# Altium PCB OBDIIBoard_MCP2551.PcbDoc
Units mm, origin at the board's own origin, x right, y up, seen from the top; angles counter-clockwise.
Board outline 44 x 44 mm, 2 copper layers (Top Layer, Bottom Layer), stack 1.571 mm thick; 38 components, 27 nets, 147 pads, 28 vias.
Unrouted connection lines stored in the file: 12.
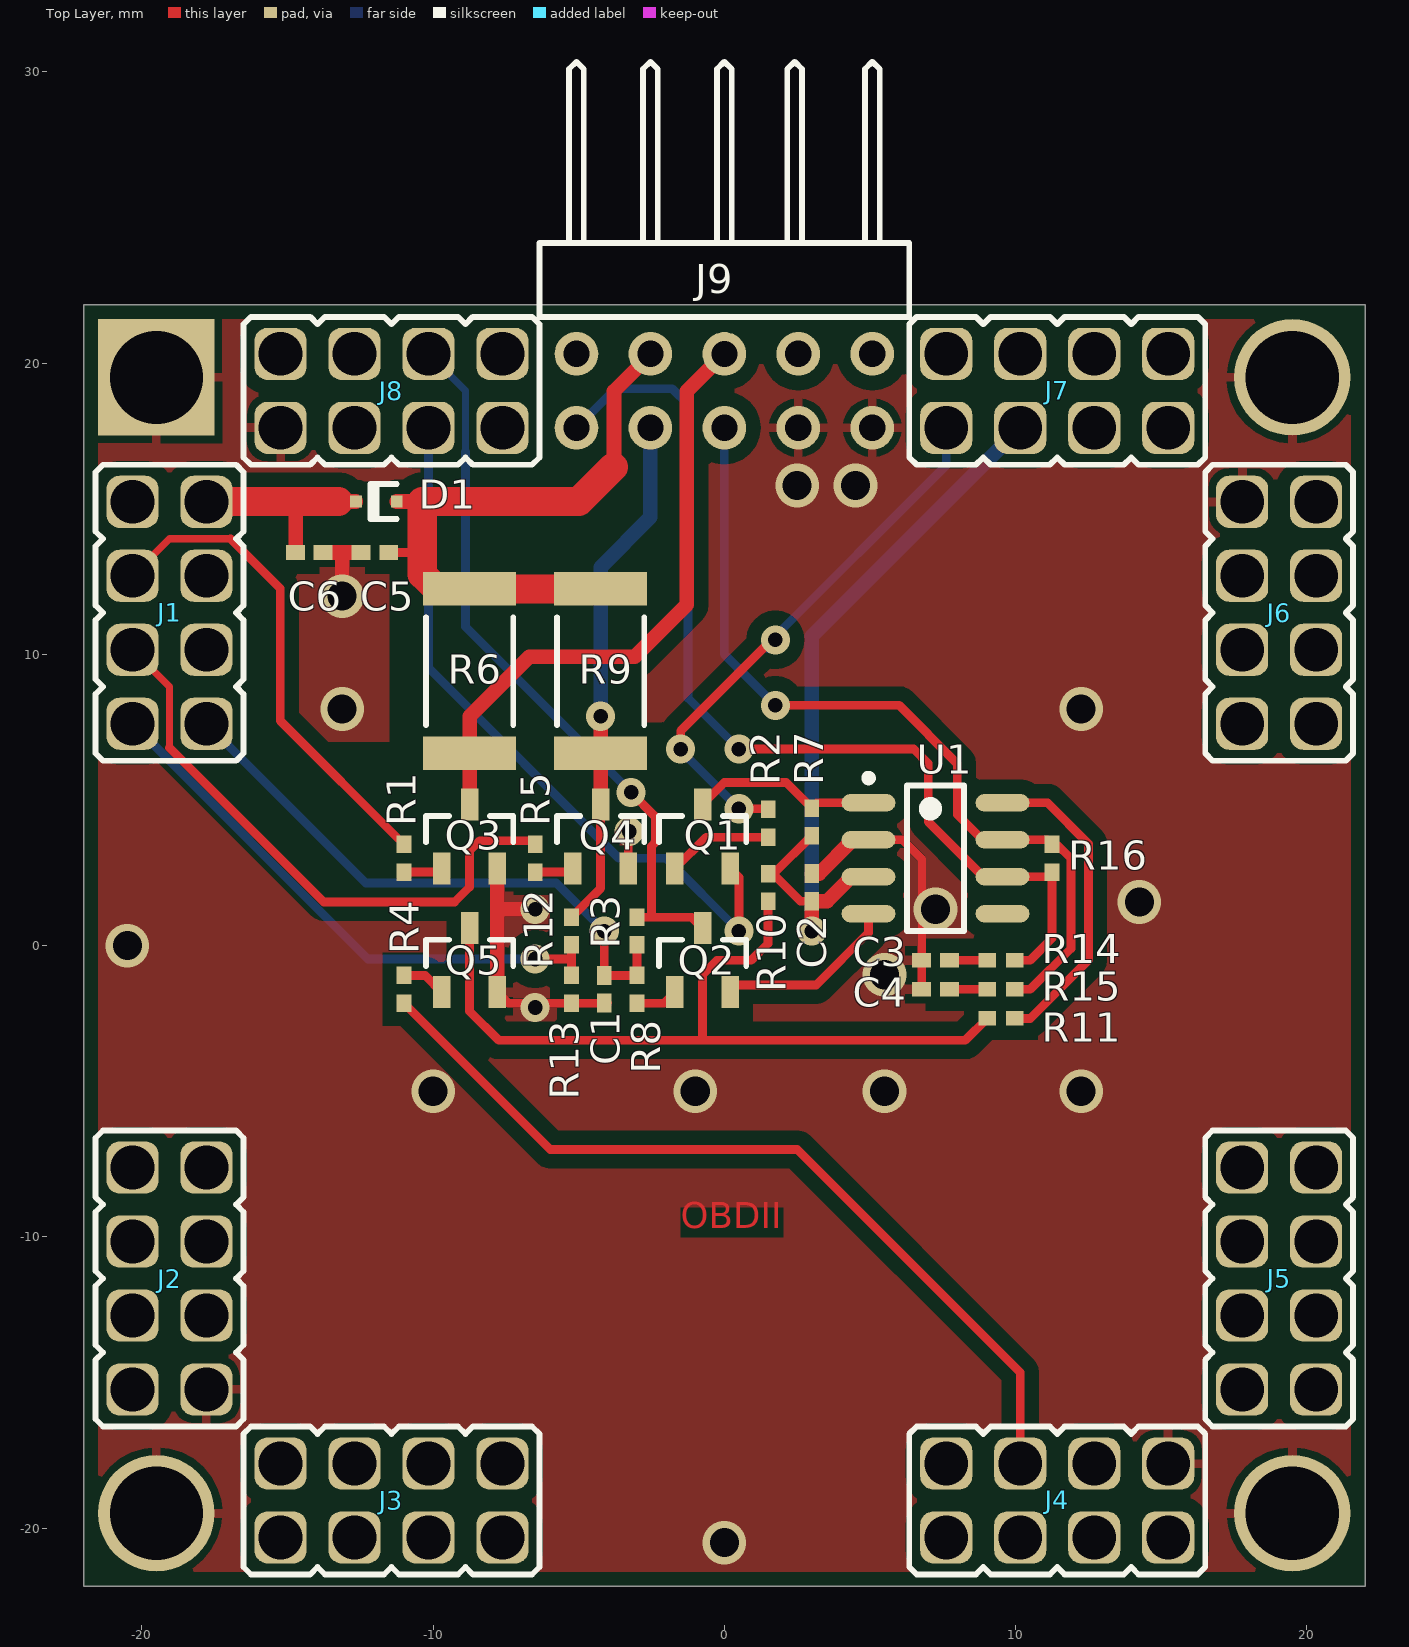
[diagram p0: Top Layer view]
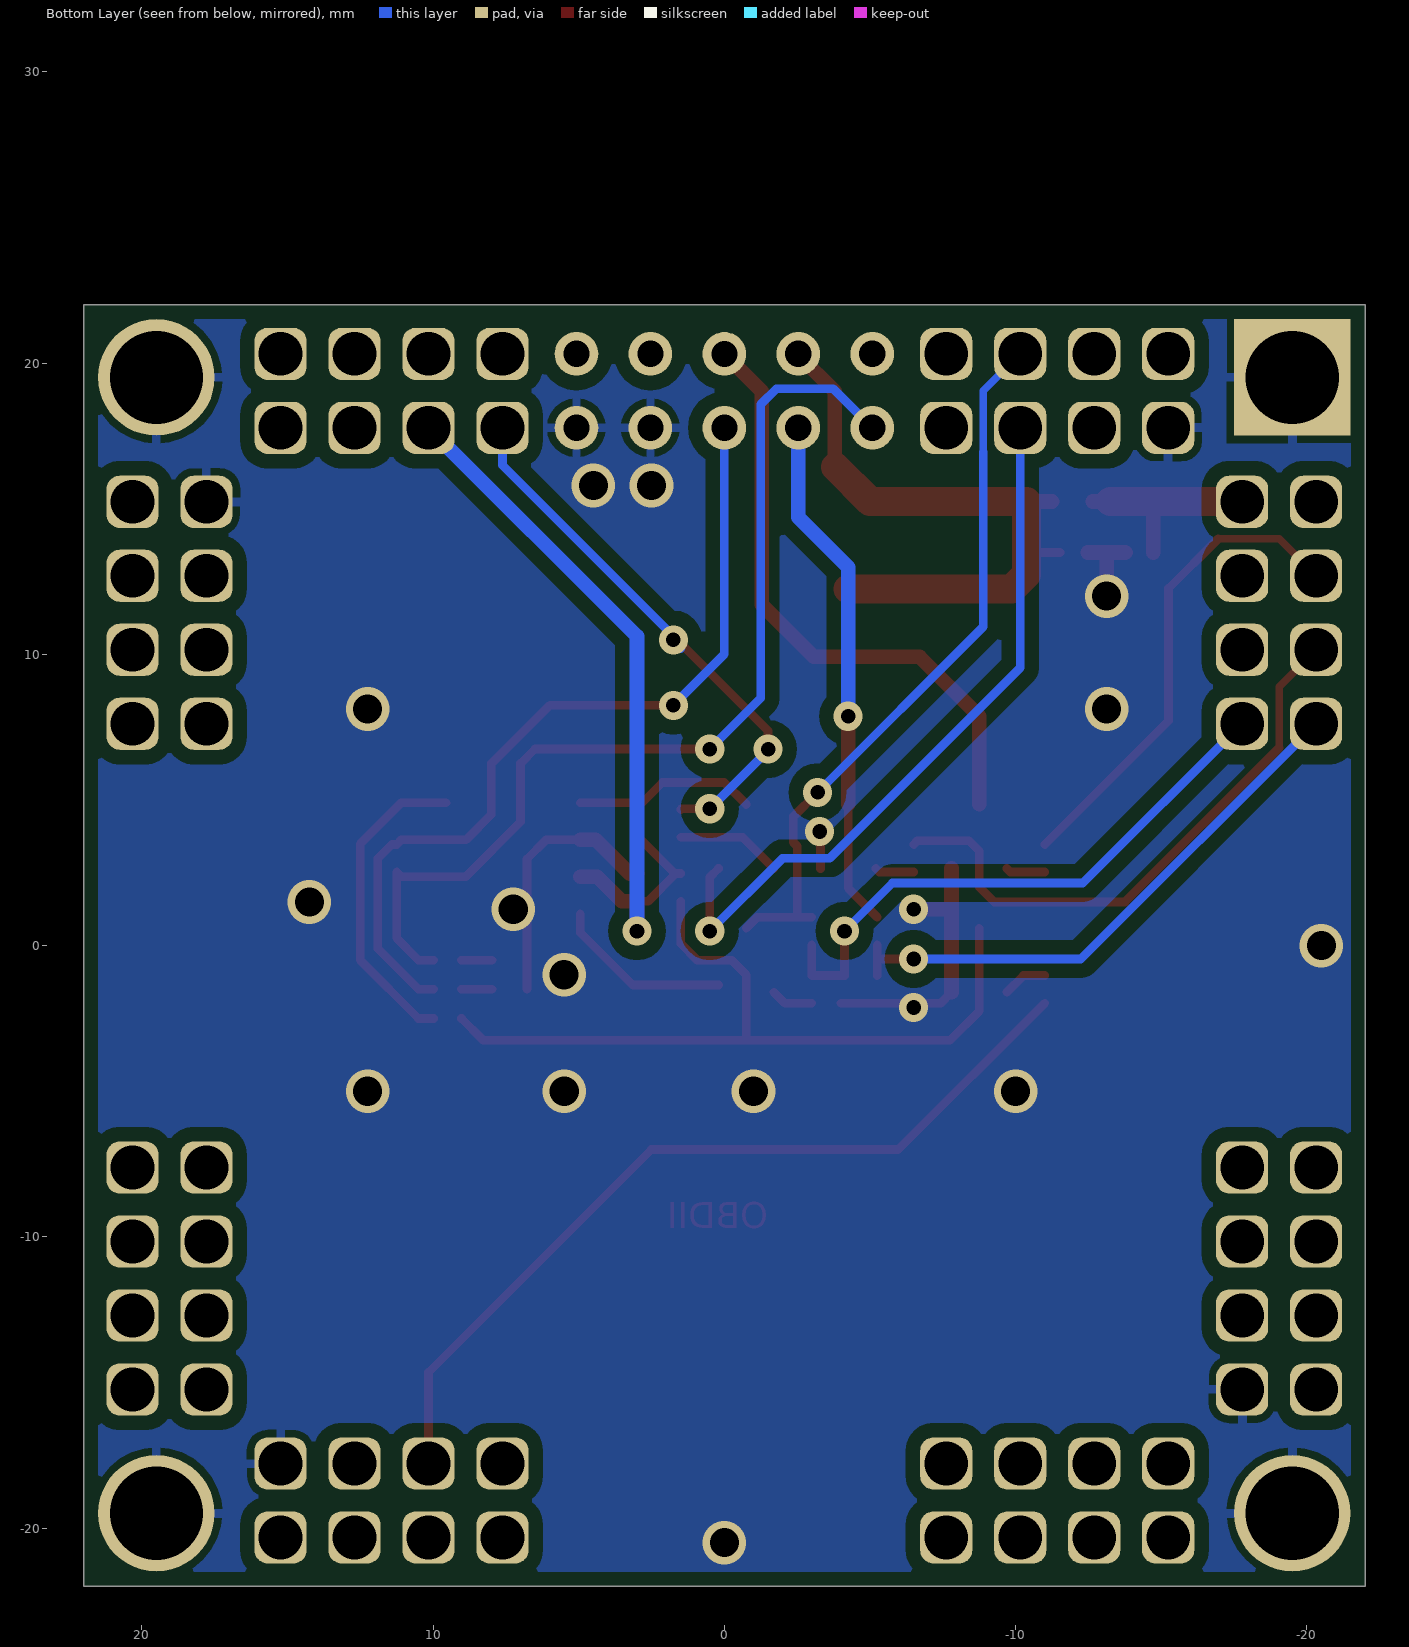
[diagram p1: Bottom Layer view, seen from below]

## Layer stack, top to bottom
Top Solder: solder mask 0.0102, Solder Resist, Dk 3.5
Top Layer: signal copper 0.0356
Dielectric 1: dielectric 1.5, FR-4, Dk 4.8
Bottom Layer: signal copper 0.0356
Bottom Solder: solder mask 0.0102, Solder Resist, Dk 3.5

## Board outline
-22,-22 -22,22 22,22 22,-22

## Design rules (kind name [scope] priority, off if disabled: settings)
Clearance Clearance_Text_GND [IsText vs InPolygon and InNet('GND')] p1: gap=0
Clearance Clearance_GND_GND [IsTrack and InNet('GND') vs InPolygon and InNet('GND')] p2: gap=0
Clearance Clearance_Polygon(GND) [InPolygon and InNet('GND')] p3: gap=0.5
Clearance [All] p4: gap=0.25
HoleSize [All] p1: absolutevalues=TRUE maxlimit=4 minlimit=0.3 maxpercent=80.000 minpercent=20.000
HoleToHoleClearance [All] p1: gap=0.25 allowstackedmicrovias=TRUE
MinimumSolderMaskSliver [All] p1: minsoldermaskwidth=0.25
PolygonConnect PolygonConnect_Via(GND) [InNet('GND') vs IsVia] p1: connectstyle=Direct reliefconductorwidth=0.254 reliefentries=4 polygonreliefangle="90 Angle" airgapwidth=0.254
PolygonConnect [All] p2: connectstyle=Relief reliefconductorwidth=0.3 reliefentries=4 polygonreliefangle="90 Angle" airgapwidth=0.254
RoutingVias [All] p1: holewidth=0.5 width=1 viastyle="Through Hole" minholewidth=0.5 minwidth=1 maxholewidth=1.5 maxwidth=2
ShortCircuit ShortCircuit_Text_GND [InPolygon and InNet('GND') vs IsText] p1: allowed=TRUE
ShortCircuit [All] p2: allowed=FALSE
SilkToSilkClearance [All] p1: silktosilkclearance=0.25
SilkToSolderMaskClearance [IsPad] p1: minsilkscreentomaskgap=0.25 clearancetoexposedcopper=TRUE
SolderMaskExpansion [All] p1: expansion=0.102
Width [All] p1: maxlimit=2 minlimit=0.25 preferedwidth=0.3
23 further rules are at their usual default settings.

## Components (designator, comment, footprint, x,y, rotation, side; value= is the part's Value field where it differs from the comment)
C1 "0.1/25" CAP0402 -4.125,-1.5 r90 top
C2 "0.1/25" CAP0402 3,2 r270 top
C3 "560/25" CAP0402 7.25,-0.5 r0 top
C4 "560/25" CAP0402 7.25,-1.5 r0 top
C5 "0.1/25" CAP0402 -12,13.5 r0 top
C6 "0.1/25" CAP0402 -14.25,13.5 r180 top
D1 "PMEG2010EJ" SOD523 -11.95,15.25 r0 top
J1 "LEFT" PBDM-8 -19.05,11.43 r270 top
J2 "LEFT" PBDM-8 -19.05,-11.43 r270 top
J3 "BOTTOM" PBDM-8 -11.43,-19.05 r0 top
J4 "BOTTOM" PBDM-8 11.43,-19.05 r0 top
J5 "RIGHT" PBDM-8 19.05,-11.43 r90 top
J6 "RIGHT" PBDM-8 19.05,11.43 r90 top
J7 "TOP" PBDM-8 11.43,19.05 r180 top
J8 "TOP" PBDM-8 -11.43,19.05 r180 top
J9 "PLD-10R" PLD-10R 0,19.05 r180 top
Q1 "MMBT3904" SOT23 -0.75,3.75 r90 top
Q2 "MMBT3904" SOT23 -0.75,-0.5 r90 top
Q3 "MMBT3904" SOT23 -8.75,3.75 r90 top
Q4 "MMBT3904" SOT23 -4.25,3.75 r90 top
Q5 "MMBT3904" SOT23 -8.75,-0.5 r90 top
R1 "3k" RES0402 -11,3 r90 top
R2 "1k" RES0402 1.5,4.2 r270 top
R3 "10k" RES0402 -3,0.5 r90 top
R4 "4.7k" RES0402 -11,-1.5 r270 top
R5 "3k" RES0402 -6.5,3 r90 top
R6 "510" RES2512 -8.75,9.425 r90 top
R7 "10k" RES0402 3,4.25 r90 top
R8 "1k" RES0402 -3,-1.5 r270 top
R9 "510" RES2512 -4.25,9.425 r90 top
R10 "10k" RES0402 1.5,2 r90 top
R11 "5.6k" RES0402 9.5,-2.5 r180 top
R12 "47k" RES0402 -5.25,0.5 r270 top
R13 "22k" RES0402 -5.25,-1.5 r270 top
R14 "100" RES0402 9.5,-0.5 r0 top
R15 "100" RES0402 9.5,-1.5 r0 top
R16 "NC(120)" RES0402 11.25,3 r270 top
U1 "MCP2551" SO8 7.25,3 r0 top

## Footprints (in the part's own frame and the unit in brackets; to place one, negate y for a bottom-side part, rotate by r counter-clockwise, add the part's x,y. Pads: shape width x height; smd on the part's side, far side on the other; paste and mask are expansions set on the pad)
CAP0402 [mm]
  rect 0.65x0.5 smd: 1(-0.475,0) 2(0.475,0)
  body extent -0.55,-0.3 0.55,0.3, height 0.5
PBDM-8 [mm] "5-pin interboard connector, pitch 2.54 mm"
  rrect50% 1.79x1.79 hole 1.5: 1(-3.81,-1.27) 2(-3.81,1.27) 3(-1.27,-1.27) 4(-1.27,1.27) 5(1.27,-1.27) 6(1.27,1.27) 7(3.81,-1.27) 8(3.81,1.27)
  silkscreen extent -5.08,-2.54 5.08,2.54, body extent -5.08,-2.54 5.08,2.54, height 3
PLD-10R [mm] "10-pin dual row (2x5) angle interboard connector, pitch 2.54 mm"
  round 1.5 hole 0.9: 1(-5.08,-1.27) 2(-5.08,1.27) 3(-2.54,-1.27) 4(-2.54,1.27) 5(0,-1.27) 6(0,1.27) 7(2.54,-1.27) 8(2.54,1.27) 9(5.08,-1.27) 10(5.08,1.27)
  silkscreen extent -6.35,-11.3 6.35,-2.54, body extent -6.35,-11.19 6.35,1.65, height 5.08
RES0402 [mm]
  rect 0.6x0.5 smd: 1(-0.475,0) 2(0.475,0)
  body extent -0.53,-0.28 0.53,0.28, height 0.35
RES2512 [mm]
  rect 1.15x3.2 smd: 1(-2.825,0) 2(2.825,0)
  silkscreen extent -1.85,-1.5 1.85,1.5, body extent -3.22,-1.63 3.22,1.63, height 0.65
SO8 [mm] "SOIC, 8-Leads, Body 4,90x3,90mm, Pitch 1,27mm, IPC High Density"
  oval 1.85x0.6 smd: 1(-2.3,1.905) 2(-2.3,0.635) 3(-2.3,-0.635) 4(-2.3,-1.905) 5(2.3,-1.905) 6(2.3,-0.635) 7(2.3,0.635) 8(2.3,1.905)
  silkscreen extent -2.42,-2.5 0.97,2.88, body extent -3,-2.54 3,2.54, height 1.7
SOD523 [mm]
  rect 0.4x0.4 smd: 1(-0.7,0) 2(0.7,0)
  silkscreen extent -0.2,-0.6 0.7,0.6, body extent -0.7,-0.6 0.7,0.6, height 0.6
SOT23 [mm]
  rect 1.1x0.6 smd: 1(-1.1,0.95) 2(-1.1,-0.95) 3(1.1,0)
  silkscreen extent -0.2,-1.5 0.7,1.5, body extent -1.15,-1.5 1.15,1.5, height 1.1

## Part data
C1 C2 C3 C4 C5 C6: library part CAP0402, "Ceramic chip capacitor 0402"
D1: "1 A very low VF MEGA Schottky barrier rectifiers"
J1 J2 J3 J4 J5 J6 J7 J8: library part PBDM-8, "2x4-pin header, pitch 2.54 mm"
J9: "Angle 2x5-pin header, pitch 2.54 mm"
Q1 Q2 Q3 Q4 Q5: "NPN General Purpose Transistor"
R1 R2 R3 R4 R5 R7 R8 R10 R11 R12 R13 R14 R15 R16: library part RES0402, "Ceramic chip resistor"
R6 R9: library part RES2512, "Ceramic chip resistor"
U1: "High-Speed CAN Transceiver"

## Free pads (board coordinates)
  round 4 hole 3.2: 0(-19.5,-19.491) 0(19.5,-19.491) 0(19.5,19.509)
  rect 4x4 hole 3.2: 0(-19.5,19.509)

## Via types
v1: diameter 1, hole 0.5, Top Layer to Bottom Layer, 14 vias
v2: diameter 1.5, hole 1, Top Layer to Bottom Layer, 14 vias

## Nets (pads, with @x,y where several pads share a name; then routed paths per layer and width w, separated by ;. In a path a pad name is that pad's centre, name@x,y a point inside that pad or via, vN(x,y) a via of type N, cw(c..) or ccw(c..) an arc to the next point about the centre after c; other vN are vias at no path point)
+5V: C2.2 J1.6 J3.6 J5.6 J7.6 R7.1 R10.2 U1.3 | length 27.3
  Top Layer w0.3: R10.2 R10.2@1.666,2.475 ; C2.2 2.616,1.525 R10.2@1.666,2.475 ; R7.1 1.7,2.475 R10.2@1.666,2.475
  Top Layer w0.5: v1(3,0.5) C2.2 3.525,1.525 4.365,2.365 U1.3
  Bottom Layer w0.5: v1(3,0.5) 3,10.62 J7.6
+12V: C6.2 D1.1 J1.2 J3.2 J5.2 J7.2 | length 6.9
  Top Layer w0.5: -14.75,15.25 -14.725,15.225 C6.2 ; -13.25,15.25 D1.1
  Top Layer w1: J1.2 -17.77,15.25 -14.75,15.25 -13.25,15.25
"+12V OBDLL": C5.2 D1.2 J9.7 R6.2 R9.2 | length 22.3
  Top Layer w0.3: C5.2 -10.375,13.5
  Top Layer w0.5: D1.2 -10.375,15.25 ; -3.81,16.44 -3.79,16.46 -3.79,19.03 -2.54,20.28 J9.7
  Top Layer w1: R9.2 R6.2 -9.875,12.25 -10.375,12.75 -10.375,13.5 -10.375,15.25 -5,15.25 -3.81,16.44
CANH: J9.6 R15.2 R16.1 U1.7 | length 29.2
  Top Layer w0.3: v1(1.751,8.25) 6,8.25 8,6.25 8,4.5 8.865,3.635 U1.7 11.09,3.635 R16.1 11.416,3.475 11.9,2.991 11.9,-0.1 10.5,-1.5 R15.2
  Bottom Layer w0.3: J9.6 0,10.001 v1(1.751,8.25)
CANL: J9.10 R14.2 R16.2 U1.6 | length 34.8
  Top Layer w0.3: v1(0.5,6.75) 6.5,6.75 7,6.25 7,4.25 8.885,2.365 U1.6 11.09,2.365 R16.2 11.25,0.25 10.5,-0.5 R14.2
  Bottom Layer w0.3: J9.10 -3.735,19.125 -1.79,19.125 -1.25,18.585 -1.25,8.5 v1(0.5,6.75)
CANRX: J8.3 Q2.3 R3.2 | length 25
  Top Layer w0.3: v1(-3.2,5.261) -2.37,4.431 -2.37,3.547 -2.5,3.417 -2.5,0.975 ; R3.2 -2.5,0.975 ; Q2.3 -1.125,0.975 -2.5,0.975
  Bottom Layer w0.25: J8.3 -8.89,19.05 -8.89,16.956
  Bottom Layer w0.3: -8.89,16.956 -8.89,10.951 v1(-3.2,5.261)
CANTX: J8.4 Q1.2 | length 24.9
  Top Layer w0.3: Q1.2 0.5,2.35 v1(0.5,0.5)
  Bottom Layer w0.3: J8.4 -10.16,9.537 -3.623,3 -2,3 v1(0.5,0.5)
GND: C1.1 C2.1 C3.1 C4.1 C5.1 C6.1 J2.8 J4.8 J6.8 J8.8 J9.2 J9.4 pad.0 Q3.2 Q4.2 Q5.2 R13.2 U1.2 | length 23.3
  Top Layer w0.3: Q5.2 -7.425,-1.975 -6.775,-1.975 -6.5,-2.25 -6.225,-1.975 R13.2 C1.1@-4,-1.975 ; Q4.2 -3.3,3.889 v1(-3.27,3.92) ; U1.2 6.115,3.635 6.775,2.975 C4.1
  Top Layer w0.5: C6.1 -13.125,13.5 ; v2(-13.125,12) -13.125,13.5 ; C5.1 -13.125,13.5 ; Q5.2 -7.8,1.25 ; Q3.2 -7.8,1.25 ; v1(-6.5,1.25) -7.8,1.25 ; C2.1 3.25,2.475 4.41,3.635 U1.2
  Bottom Layer w0.5: v2(-13.125,12) v2@-13.125,12.5
  other v1: -6.5,-2.125
  other v2: 0,-20.5 -10,-5 -1,-5 5.5,-5 12.25,-5 5.5,-1 -20.5,0 7.25,1.25 14.25,1.5 -13.125,8.125 12.25,8.125 2.5,15.8 4.5,15.8
ISO-K: J9.8 Q4.3 R9.1 R12.1 | length 17.9
  Top Layer w0.3: R12.1 -4.25,1.975 Q4.3
  Top Layer w0.5: Q4.3 R9.1 v1(-4.25,7.875)
  Bottom Layer w0.5: v1(-4.25,7.875) -4.25,13 -2.54,14.71 J9.8
ISO-L: J9.5 Q3.3 R6.1 | length 21.2
  Top Layer w0.5: Q3.3 R6.1 -8.75,7.875 -6.7,9.925 -3.075,9.925 -1.29,11.71 -1.29,19.03 J9.5
K-LINE: J1.5 R5.2 | length 20.3
  Top Layer w0.25: J1.5 -19.05,8.89 -19.05,6.796
  Top Layer w0.3: -19.05,6.796 -13.754,1.5 -9.266,1.5 -8.75,2.016 -8.75,3.25 -8.4,3.6 -6.625,3.6 R5.2
"K-LINE IN": J1.7 R12.2 R13.1 | length 19.5
  Top Layer w0.3: v1(-6.5,-0.46) -5.25,-0.46 ; -5.275,-0.435 -5.25,-0.46 ; R13.1 -5.25,-0.46 ; R12.2 -5.25,-0.46
  Bottom Layer w0.3: J1.7 -12.24,-0.46 v1(-6.5,-0.46)
L-LINE: J1.3 R1.2 | length 16.9
  Top Layer w0.25: J1.3 -19.05,13.97 -16.956,13.97
  Top Layer w0.3: -16.956,13.97 -15.25,12.264 -15.25,7.725 R1.2
NetC3_2: C3.2 R14.1 | length 1
  Top Layer w0.3: C3.2@7.975,-0.5 R14.1
NetC4_2: C4.2 R15.1 | length 1
  Top Layer w0.3: C4.2@7.975,-1.5 R15.1
NetQ1_1: Q1.1 R2.2 | length 3.6
  Top Layer w0.3: Q1.1 -0.625,3.725 R2.2
NetQ1_3: Q1.3 R7.2 U1.1 | length 6.4
  Top Layer w0.3: Q1.3 0,5.6 2.125,5.6 R7.2 3.18,4.905 U1.1
NetQ2_1: Q2.1 R8.2 | length 1.5
  Top Layer w0.3: R8.2 -2.075,-1.975 Q2.1
NetQ2_2: Q2.2 U1.4 | length 6.1
  Top Layer w0.3: Q2.2@0.2,-1.35 3.15,-1.35 4.95,0.45 U1.4
NetQ3_1: Q3.1 R1.1 | length 1.4
  Top Layer w0.3: R1.1 -9.825,2.525 Q3.1
NetQ4_1: Q4.1 R5.1 | length 1.4
  Top Layer w0.3: R5.1 -5.325,2.525 Q4.1
NetQ5_1: Q5.1 R4.1 | length 1.5
  Top Layer w0.3: R4.1 -10.275,-1.025 Q5.1
NetQ5_3: Q5.3 R10.1 R11.2 | length 27.7
  Top Layer w0.3: Q5.3 -8.75,-2.25 -7.75,-3.25 -0.75,-3.25 ; R10.1 1.5,0.074 0.927,-0.5 -0.25,-0.5 -0.75,-1 -0.75,-3.25 ; R11.2 8.275,-3.25 -0.75,-3.25
NetR11_1: R11.1 U1.8 | length 10.9
  Top Layer w0.3: U1.8 11.095,4.905 12.5,3.5 12.5,-0.5 10.5,-2.5 R11.1
SLEEP: J4.4 R4.2 | length 29.5
  Top Layer w0.3: R4.2 -5.975,-7 2.5,-7 10.16,-14.66 J4.4
VBAT: J1.4 J3.4 J5.4 J7.4
VCC: C1.2 J1.8 J3.8 J5.8 J7.8 R2.1 R3.1 R8.1 | length 39.1
  Top Layer w0.3: v1(-4.125,0.5) C1.2 R8.1 R3.1 ; v1(-1.5,6.75) -1.5,7.374 1.626,10.5 v1(1.75,10.5) ; v1(0.5,4.7) 1.475,4.7 R2.1
  Bottom Layer w0.3: J1.8 -12.31,2.15 -5.775,2.15 v1(-4.125,0.5) ; v1@-1.25,6.45 v1(0.5,4.7) ; v1@1.5,10.2 1.5,10.374 7.62,16.494 J7.8
pads on no net: J1.1 J2.1 J2.2 J2.3 J2.4 J2.5 J2.6 J2.7 J3.1 J3.3 J3.5 J3.7 J4.1 J4.2 J4.3 J4.5 J4.6 J4.7 J5.1 J5.3 J5.5 J5.7 J6.1 J6.2 J6.3 J6.4 J6.5 J6.6 J6.7 J7.1 J7.3 J7.5 J7.7 J8.1 J8.2 J8.5 J8.6 J8.7 J9.1 J9.3 J9.9 U1.5

## Polygon pours and split planes (outlines as drawn)
GND on Bottom Layer "Bottom-GND" (solid, remove dead copper, pour order 4): -21.5,21.5 21.5,21.5 21.5,-21.5 -21.5,-21.5
GND on Top Layer "Top-GND" (solid, remove dead copper, pour order 6): -21.5,21.5 21.5,21.5 21.5,-21.5 -21.5,-21.5

## Other copper
Top Layer:
  pour cut-out: -2.75,12.75 -2.75,5 -3.5,5.75 -13.75,5.75 -13.75,7 -11.5,7 -11.5,12.75
  text "OBDII" at -1.5,-10 h1.52

## Silkscreen, mask and mechanical layers (free items; w line width, h text height)
Board:
  the board outline again, w0.2